# Altium PCB Copy of new_switch_control_one.PcbDoc
Units mil, origin at the board's own origin, x right, y up, seen from the top; angles counter-clockwise.
Board outline 6000 x 4000 mil, 2 copper layers (Top Layer, Bottom Layer); 20 components, 14 nets, 51 pads, 0 vias.
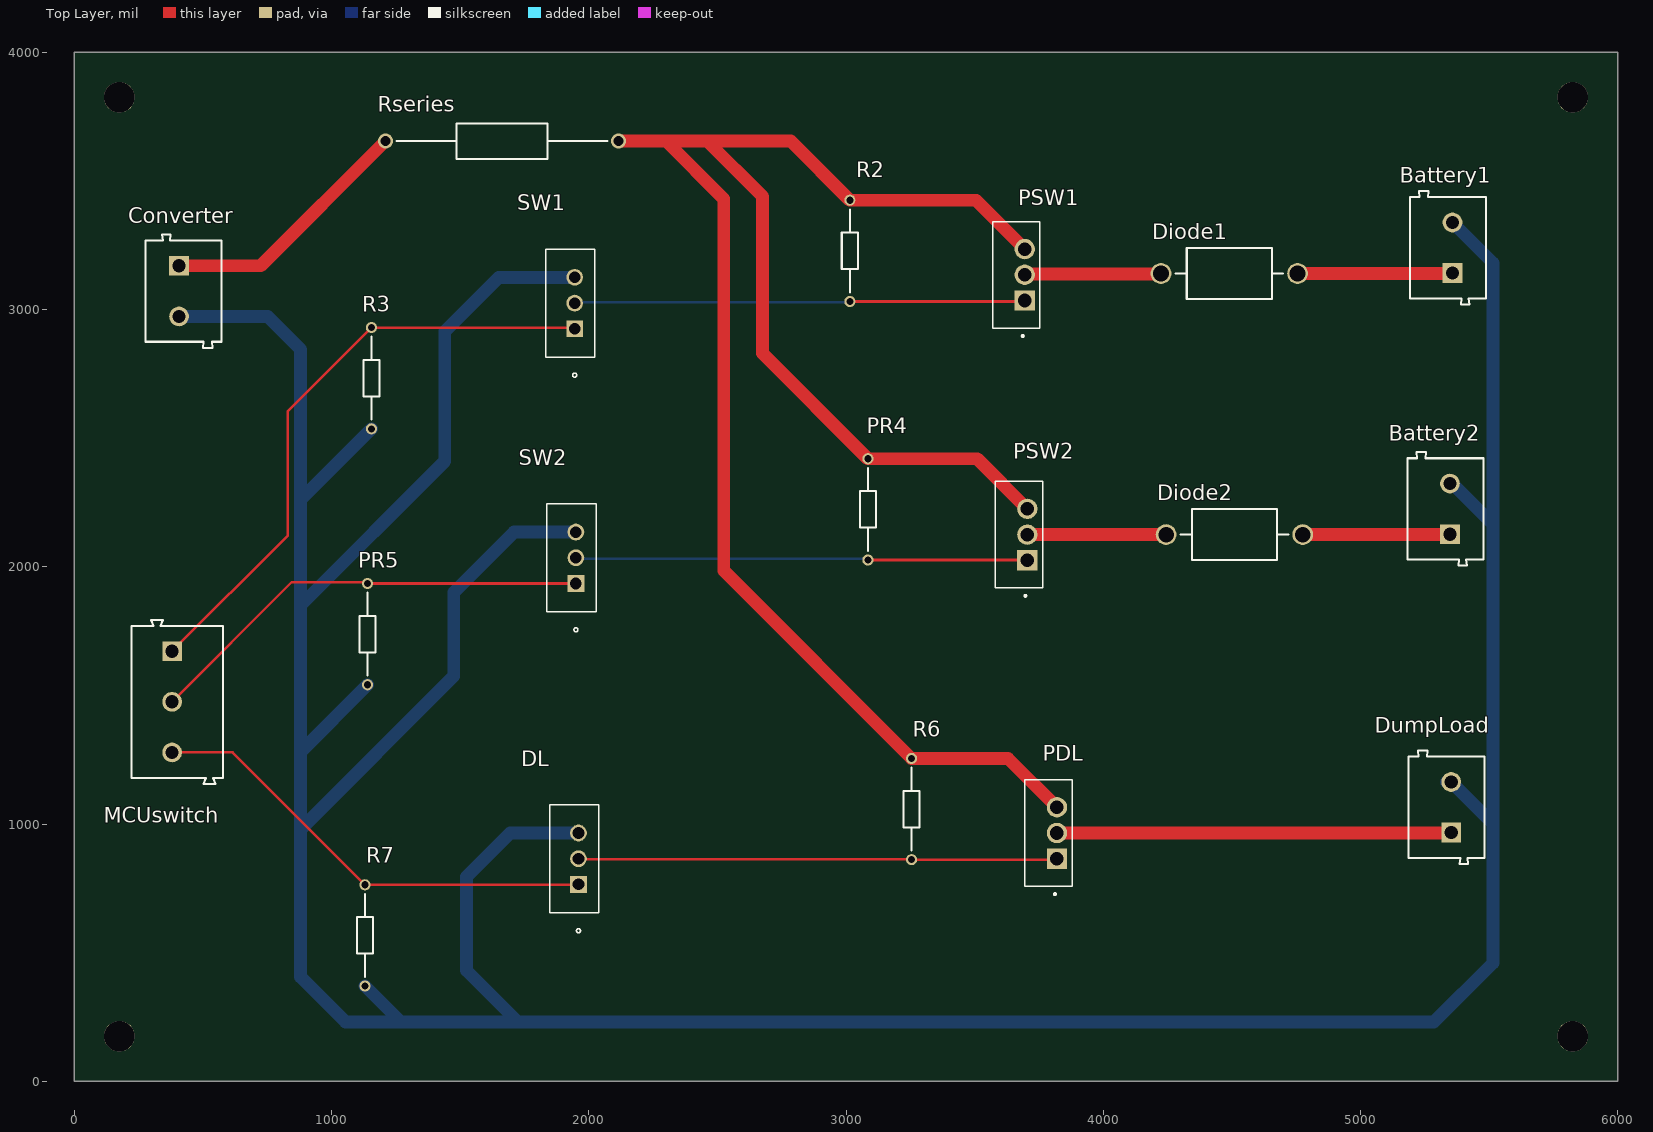
[diagram p0: Top Layer view]
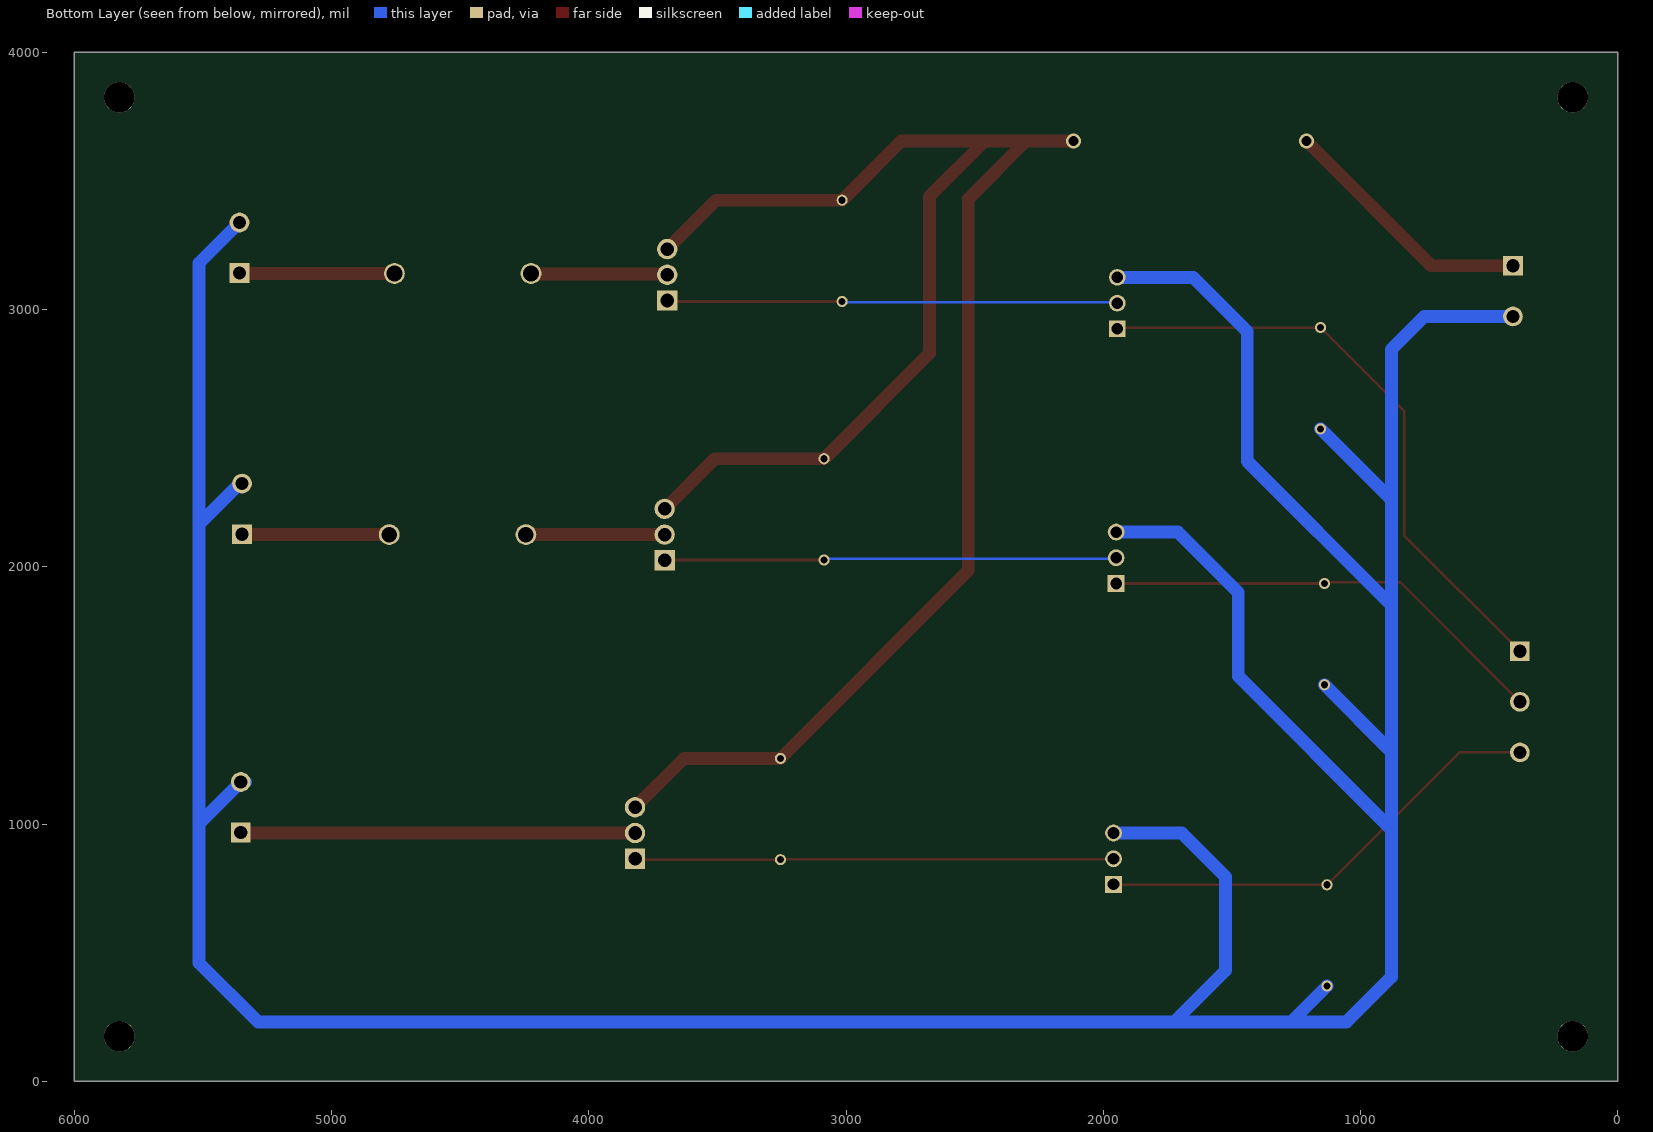
[diagram p1: Bottom Layer view, seen from below]

## Layer stack, top to bottom
Top Solder: solder mask 0.4, Solder Resist, Dk 3.5
Top Layer: signal copper 1.4
Dielectric 1: dielectric 12.6, FR-4, Dk 4.8
Bottom Layer: signal copper 1.4
Bottom Solder: solder mask 0.4, Solder Resist, Dk 3.5

## Board outline
0,0 6000,0 6000,4000 0,4000

## Design rules (kind name [scope] priority, off if disabled: settings)
Clearance [All] p1: gap=10 ignorepadtopadclearanceinfootprint=FALSE except(0: Arc-Hole Track-Hole SMDPad-Hole THPad-Hole Via-Hole Fill-Hole Poly-Hole Region-Hole Text-Hole)
HoleSize [All] p1: absolutevalues=TRUE maxlimit=130 minlimit=1 maxpercent=80.000 minpercent=20.000
PolygonConnect [All] p1: connectstyle=Relief reliefconductorwidth=10 reliefentries=4 polygonreliefangle="90 Angle" airgapwidth=10
RoutingVias [All] p1: holewidth=28 width=50 viastyle="Through Hole" minholewidth=28 minwidth=50 maxholewidth=28 maxwidth=50
SilkToSolderMaskClearance [IsPad] p1: minsilkscreentomaskgap=9 clearancetoexposedcopper=TRUE
SolderMaskExpansion [All] p1: expansion=4 istentingtop=FALSE
Width [All] p1: maxlimit=60 minlimit=10 preferedwidth=50
28 further rules are at their usual default settings.

## Components (designator, comment, footprint, x,y, rotation, side; value= is the part's Value field where it differs from the comment)
Battery1 "691102710002" 691102710002 5340,3240 r90 top
Battery2 "691102710002" 691102710002 5330,2225 r90 top
Converter "691102710002" 691102710002 425,3071.57 r270 top
Diode1 "1N5401" ONSC-AXIAL_LEAD-2-267-05_V 4490,3140 r180 top
Diode2 "1N5401" ONSC-AXIAL_LEAD-2-267-05_V 4510,2125 r180 top
DL "STP36NF06L" TO-220_STM 1960,765 r90 top
DumpLoad "691102710002" 691102710002 5335,1065 r90 top
MCUswitch "691101710003" 691101710003 400,1475 r270 top
PDL "IRF9540" TO254P1052X465X1989-3 3820,865 r90 top
PR4 "MBA02040Z0000ZC100" RESAD1000W50L360D160 3085,2420 r270 top
PR5 "MBA02040Z0000ZC100" RESAD1000W50L360D160 1140,1541.3 r90 top
PSW1 "IRF9540" TO254P1052X465X1989-3 3695,3035 r90 top
PSW2 "IRF9540" TO254P1052X465X1989-3 3705,2025 r90 top
R2 "MBA02040Z0000ZC100" RESAD1000W50L360D160 3015,3425 r270 top
R3 "MBA02040Z0000ZC100" RESAD1000W50L360D160 1155,2536.3 r90 top
R6 "MBA02040Z0000ZC100" RESAD1000W50L360D160 3255,1255 r270 top
R7 "MBA02040Z0000ZC100" RESAD1000W50L360D160 1130,370 r90 top
Rseries "SPRX1CT52RR20J" RESAD2300W80L900D350 1210,3655 r0 top
SW1 "STP36NF06L" TO-220_STM 1945,2925 r90 top
SW2 "STP36NF06L" TO-220_STM 1950,1935 r90 top

## Footprints (in the part's own frame and the unit in brackets; to place one, negate y for a bottom-side part, rotate by r counter-clockwise, add the part's x,y. Pads: shape width x height; smd on the part's side, far side on the other; paste and mask are expansions set on the pad)
691101710003 [mm] "5,00mm - modular - blue - Horizontal entry with pressure clamp - 12,6mm height - 03p"
  rect 1.95x1.95 hole 1.3: 1(-5,-0.5)
  round 1.95 hole 1.3: 2(0,-0.5) 3(5,-0.5)
  silkscreen extent -8.1,-4.5 8.1,4.5, body extent -8.1,-4.5 8.1,4.5, height 12.65
691102710002 [mm] "5,00mm - modular - blue - Horizontal entry with pressure clamp - 9,9 mm height - 02p"
  rect 1.95x1.95 hole 1.3: 1(-2.5,-0.45)
  round 1.95 hole 1.3: 2(2.5,-0.45)
  silkscreen extent -5.6,-3.75 5.6,3.75, body extent -5.6,-3.75 5.6,3.75, height 9.96
ONSC-AXIAL_LEAD-2-267-05_V [mm] "AXIAL, 2-Leads, Diameter 5.05mm"
  round 2.05 hole 1.55: 1(-6.745,0) 2(6.745,0)
  silkscreen extent -5.32,-2.52 5.32,2.52
RESAD1000W50L360D160 [mm]
  round 1.1 hole 0.7: 1(0,0) 2(10,0)
  silkscreen extent 0.9,-0.8 9.1,0.8
RESAD2300W80L900D350 [mm]
  round 1.5 hole 1: 1(0,0) 2(23,0)
  silkscreen extent 1.1,-1.75 21.9,1.75, body extent -0.4,-2 23.4,2, height 3.99
TO254P1052X465X1989-3 [mm]
  rect 2.01x2.01 hole 1.34: 1(0,0)
  round 2.01 hole 1.34: 2(2.54,0) 3(5.08,0)
  silkscreen extent -3.6,-1.5 7.8,3.16
TO-220_STM [mil]
  rect 65x65 hole 45: 1(0,0)
  round 65 hole 45: 2(100,0) 3(200,0)
  silkscreen extent -188,-78 310,113, body extent -105,-74 305,108, height 776

## Part data
Battery1 Battery2 Converter DumpLoad: library part CMP-1502-03258-1, "Series 102 - 5.00 mm Horizontal Entry Modular with Pressure Clamp WR-TBL, 2 pin", Manufacturer="Wurth Elektronik", Operating Temperature=-40to105degC, Datasheet URL=http://katalog.we-online.de/em/datasheet/6911027100xx.pdf, Manufacturer URL=http://www.we-online.de, Mounting Technology=THT, Package Reference=691102710002, Packaging=Box, Part Number=691102710002, Pin Number=2, Pitch=5.00mm, Publisher=WurthElektronik
Diode1 Diode2: library part CMP-0902-00078-1, "Standard Recovery Rectifier, 2-Pin Axial_Lead, Pb-Free, Bulk Box", Manufacturer="On Semiconductor", ComponentLink1Description="Manufacturer URL", ComponentLink1URL=http://www.onsemi.com/, ComponentLink2Description=Datasheet, ComponentLink2URL=http://www.onsemi.com/pub_link/Collateral/1N5400-D.PDF, ComponentLink3Description="Package Specification", ComponentLink3URL=http://www.onsemi.com/pub_link/Collateral/267-05.PDF, DatasheetVersion="Rev. 10", IFSM Max (A)=200, IO(rec) Max (A)=3, Mounting Technology="Through Hole", PackageDescription="2-Pin, Axial Lead, Diameter 5.05 mm", PackageReference=AXIAL_LEAD-2-267-05, PackageVersion="Rev. G, 06/2000", Packing="Bulk Box", PartNumber=1N5401, RoHS=TRUE, Type="Standard Recovery", VRRM Max (V)=100
DL SW1 SW2: "No Description Available", Mfr_Name=STMicroelectronics, Copyright="Copyright (C) 2022 Ultra Librarian. All rights reserved.", Digi-Key_Part_Number_1=497-7522-5-ND, Manufacturer_Part_Number=STP36NF06L, RefDes=RefDes, Type=DEV
MCUswitch: library part CMP-1502-03257-1, "Series 101 - 5.00 mm Horizontal Entry Modular with Pressure Clamp WR-TBL, 3 pin", Manufacturer="Wurth Elektronik", Operating Temperature=-40to105degC, Datasheet URL=http://katalog.we-online.de/em/datasheet/6911017100xx.pdf, Manufacturer URL=http://www.we-online.de, Mounting Technology=THT, Package Reference=691101710003, Packaging=Box, Part Number=691101710003, Pin Number=3, Pitch=5.00mm, Publisher=WurthElektronik
PDL PSW1 PSW2: "P-Channel 100V 19A (Tc) 150W (Tc) Through Hole TO-220AB", Package="TO-220 International Rectifier", Digi-Key_Part_Number=IRF9540PBF-ND, MF="Vishay Siliconix", MP=IRF9540, SnapEDA_Link=https://www.snapeda.com/parts/IRF9540/Vishay%20Siliconix/view-part/1087953/?ref=snap
PR4 PR5 R2 R3 R6 R7: "Resistor", Manufacturer_Name=Vishay, Datasheet Link=https://www.vishay.com/docs/28766/mbxsma.pdf, Manufacturer_Part_Number=MBA02040Z0000ZC100
Rseries: "Resistor", Manufacturer_Name="KOA Speer", Datasheet Link=https://componentsearchengine.com/Datasheets/1/SPRX1CT52RR20J.pdf, Manufacturer_Part_Number=SPRX1CT52RR20J

## Free pads (board coordinates)
  round 120 hole 120: 2(5825,3825) 3(5825,175) 4(175,175) 5(175,3825)

## Nets (pads, with @x,y where several pads share a name; then routed paths per layer and width w, separated by ;. In a path a pad name is that pad's centre, name@x,y a point inside that pad or via, vN(x,y) a via of type N, cw(c..) or ccw(c..) an arc to the next point about the centre after c; other vN are vias at no path point)
GND: Battery1.2 Battery2.2 Converter.2 DL.3 DumpLoad.2 PR5.1 R3.1 R7.1 SW1.3 SW2.3 | length 16891.9
  Bottom Layer w50: Converter.2@425,2973.15 751.85,2973.15 880,2845 880,2261.3 ; R7.1 1270,230 ; PR5.1 880,1281.3 ; R3.1 880,2261.3 ; SW1.3 1650,3125 1440,2915 1440,2410 885,1855 880,1855 ; SW2.3 1710,2135 1475,1900 1475,1575 880,980 ; DL.3 1695,965 1525,795 1525,430 1725,230 ; DumpLoad.2@5335,1163.43 DumpLoad.2@5336.57,1163.43 ; Battery2.2 5354.96,2323.43 5368.35,2310.04 5369.96,2310.04 5515,2165 ; DumpLoad.2 5515,1001.14 ; Battery1.2 5515,3181.14 5515,2165 ; 880,980 880,1281.3 ; 880,980 880,405 1055,230 1270,230 ; 880,1281.3 880,1855 ; 880,1855 880,2261.3 ; 1270,230 1725,230 ; 1725,230 5285,230 5515,460 5515,1001.14 ; 5515,1001.14 5515,2165
NetBattery1_1: Battery1.1 Diode1.1 | length 585.1
  Top Layer w10: Battery1.1@5338.43,3140 Battery1.1@5340,3141.57
  Top Layer w50: Diode1.1 Battery1.1@5338.43,3140
NetBattery2_1: Battery2.1 Diode2.1 | length 555.1
  Top Layer w10: Battery2.1@5328.43,2125 Battery2.1@5330,2126.57
  Top Layer w50: Diode2.1 Battery2.1@5328.43,2125
NetConverter_1: Converter.1 Rseries.1 | length 985.9
  Top Layer w50: Converter.1@425,3170 725,3170 Rseries.1
NetDiode1_2: Diode1.2 PSW1.2 | length 531.5
  Top Layer w10: PSW1.2 PSW1.2@3697.5,3137.5 ; Diode1.2@4221.95,3137.5 Diode1.2
  Top Layer w50: PSW1.2@3697.5,3137.5 Diode1.2@4221.95,3137.5
NetDiode2_2: Diode2.2 PSW2.2 | length 539.4
  Top Layer w50: PSW2.2 Diode2.2
NetDL_1: DL.1 MCUswitch.3 R7.2 | length 1793.3
  Top Layer w10: MCUswitch.3 615.54,1278.16 R7.2 1958.7,763.7 DL.1
NetDL_2: DL.2 PDL.1 R6.2 | length 1863.1
  Top Layer w10: DL.2 1961.85,863.15 3253.15,863.15 R6.2 3816.3,861.3 PDL.1
NetDumpLoad_1: DumpLoad.1 PDL.2 | length 1515.7
  Top Layer w10: DumpLoad.1@5333.43,965 DumpLoad.1@5335,966.57
  Top Layer w50: PDL.2 DumpLoad.1@5333.43,965
NetMCUswitch_1: MCUswitch.1 R3.2 SW1.1 | length 2371.1
  Top Layer w10: MCUswitch.1 830,2121.55 830,2605 R3.2 1940,2930 SW1.1
NetMCUswitch_2: MCUswitch.2 PR5.2 SW2.1 | length 1764.4
  Top Layer w10: MCUswitch.2 845.3,1940 1135,1940 PR5.2 SW2.1
NetPR4_2: PR4.2 PSW2.1 SW2.2 | length 1759.1
  Top Layer w10: PR4.2 3703.7,2026.3 PSW2.1
  Bottom Layer w10: SW2.2 1954.35,2030.65 3080.65,2030.65 PR4.2
NetPSW1_1: PSW1.1 R2.2 SW1.2 | length 1758.6
  Top Layer w10: R2.2@3011.85,3028.15 R2.2 3691.3,3031.3 PSW1.1
  Bottom Layer w10: SW1.2 1948.15,3028.15 3011.85,3028.15 R2.2
VCC: PDL.3 PR4.1 PSW1.3 PSW2.3 R2.1 R6.1 Rseries.2 | length 7387.4
  Top Layer w50: Rseries.2 2300,3655 ; PSW1.3 3505,3425 R2.1 2785,3655 2460,3655 ; PSW2.3 3510,2420 PR4.1 2675,2830 2675,3440 2460,3655 ; PDL.3 3630,1255 R6.1 2525,1985 2525,3430 2300,3655 ; 2300,3655 2460,3655

## Silkscreen, mask and mechanical layers (free items; w line width, h text height)
Board:
  lines w10: 0,0 6000,0 6000,1060 6000,4000 0,4000 0,0